# Altium PCB Flexprint_Serverport.PcbDoc
Units mm, origin at the board's own origin, x right, y up, seen from the top; angles counter-clockwise.
Board outline 22 x 16.17 mm, 2 copper layers (Top Layer, Bottom Layer); 5 components, 3 nets, 17 pads, 2 vias.
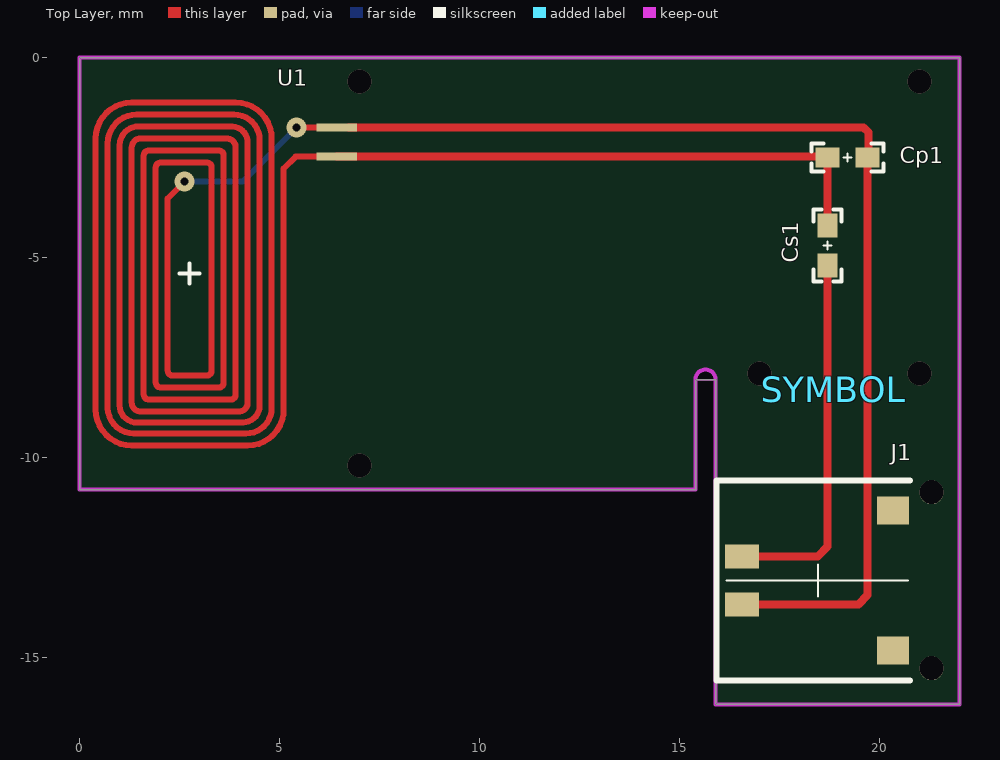
[diagram p0: Top Layer view]
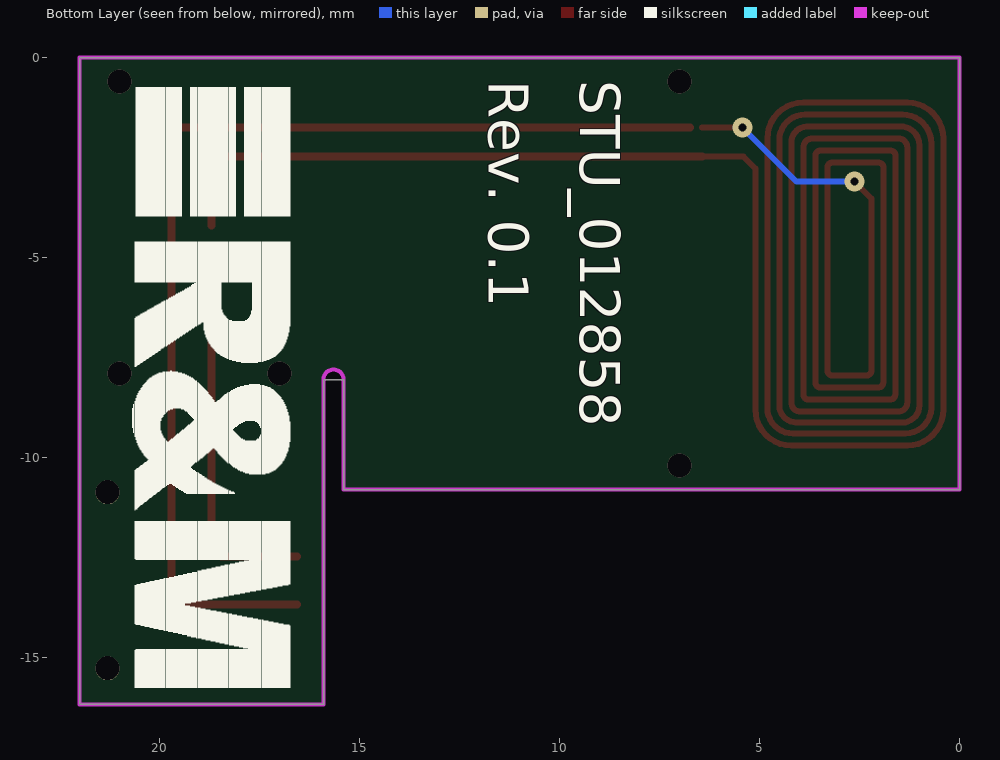
[diagram p1: Bottom Layer view, seen from below]
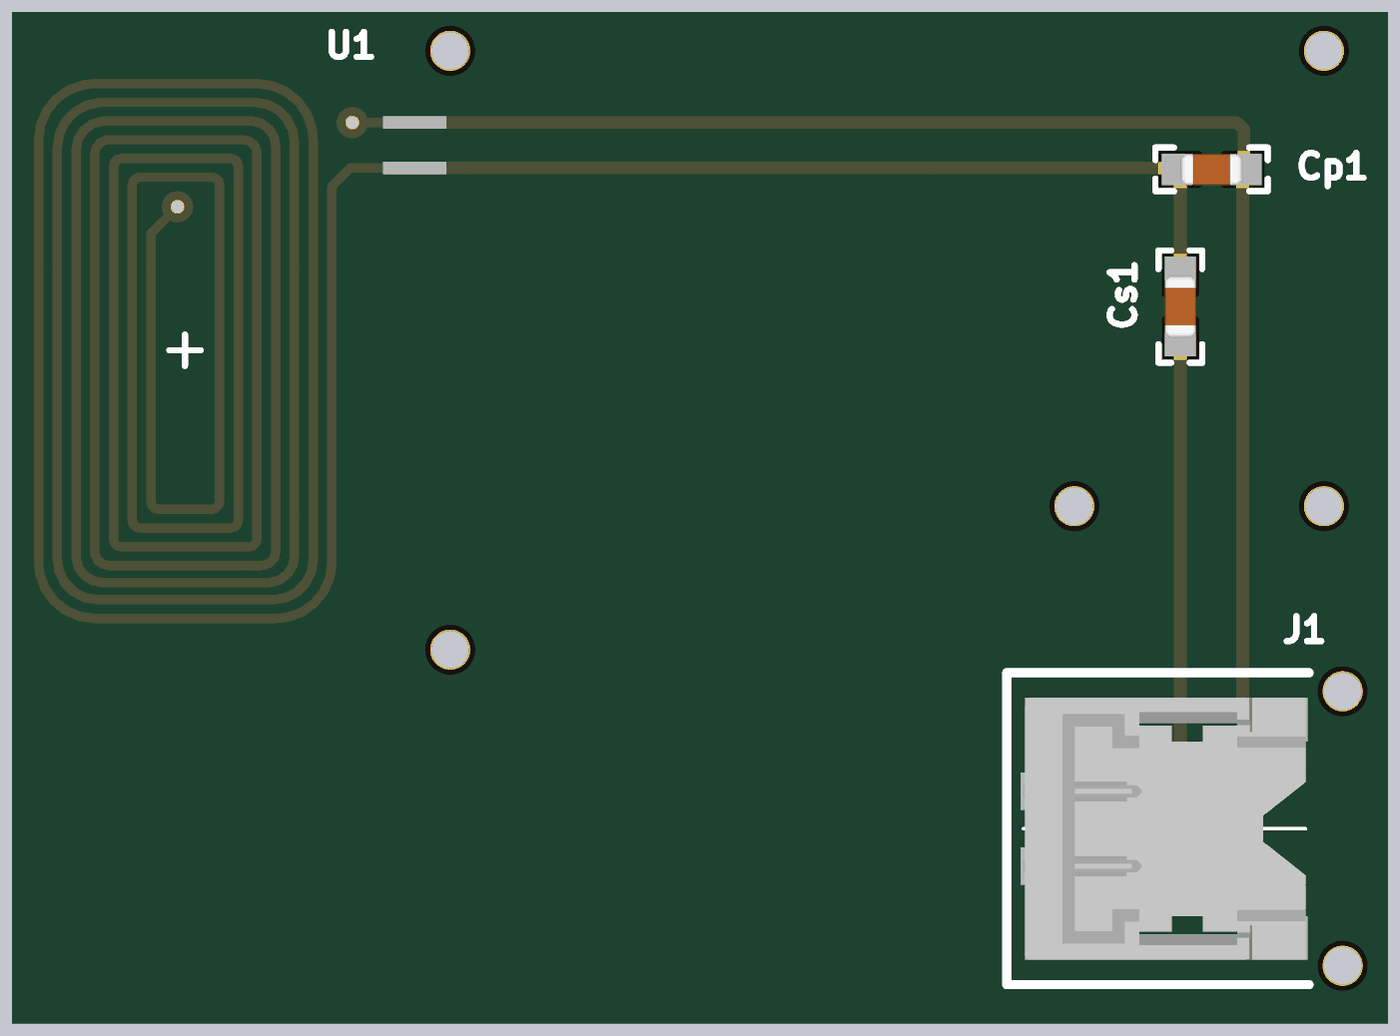
[diagram p2: 3D render of the assembled board from above, using the file's embedded part models]

## Layer stack, top to bottom
Top Solder: solder mask 0.0102, Solder Resist, Dk 3.5
Top Layer: signal copper 0.0356
Dielectric 1: dielectric 0.32, FR-4, Dk 4.8
Bottom Layer: signal copper 0.0356
Bottom Solder: solder mask 0.0102, Solder Resist, Dk 3.5

## Board outline
0,0 0,-10.8 15.4,-10.8 15.4,-8.05 15.9,-8.05 15.9,-16.17 22,-16.17 22,0
cut-out: 15.4,-8.05 15.9,-8.05 ccw(c15.65,-8.05)
board region rigid_2: 22,-9.45 22,-16.17 15.9,-16.17 15.9,-9.45
board region flex: 15.9,-9.45 15.9,-8.551 22,-8.57 22,-9.45
board region rigid_1: 15.9,-8.551 15.9,-8.05 15.4,-8.05 15.4,-10.8 0,-10.8 0,0 22,0 22,-8.57

## Design rules (kind name [scope] priority, off if disabled: settings)
Clearance [All] p1: gap=0.127 ignorepadtopadclearanceinfootprint=TRUE
MinimumSolderMaskSliver [All] p1: minsoldermaskwidth=0.1
PolygonConnect [All] p1: connectstyle=Relief reliefconductorwidth=0.254 reliefentries=4 polygonreliefangle="90 Angle" airgapwidth=0.254
RoomDefinition Flexprint_Serverport [InComponentClass('Flexprint_Serverport')] p1: confinementstyle=ConfineIn formatcopy=TRUE lockcomponents=FALSE outline -1.02,-17.51 23.06,-17.51 23.06,1.42 -1.02,1.42
RoutingVias [All] p1: holewidth=0.711 width=1.27 viastyle="Through Hole" minholewidth=0.508 minwidth=0.635 maxholewidth=1.27 maxwidth=2.032 useviatemplates=TRUE viatemplateguid#1={2C9BFAAF-4DE9-41A7-A408-CE1864FF48D1} viatemplatename#1=v50h20m0mx0
SilkToSolderMaskClearance [IsPad] p1 off: minsilkscreentomaskgap=0.1 clearancetoexposedcopper=TRUE
SolderMaskExpansion [All] p1: expansion=0.102
Width [All] p1: maxlimit=0.381 minlimit=0.127 preferedwidth=0.203 minimp=50.000000 maximp=50.000000 favimp=50.000000
28 further rules are at their usual default settings.

## Components (designator, comment, footprint, x,y, rotation, side; value= is the part's Value field where it differs from the comment)
Cp1 "470pF" C0402 19.2,-2.5 r0 top
Cs1 "180pF" C0402 18.7,-4.7 r270 top
J1 "Molex 0781710002" CONN_2X1 18.46,-13.07 r90 top
SYMBOL "Reichle & De-Massari Logo" SYMBOL_R&M 18.86,-8.29 r270 top net-tie value=Overlay
U1 "Antenna" ANT 2.75,-5.4 r180 top net-tie

## Footprints (in the part's own frame and the unit in brackets; to place one, negate y for a bottom-side part, rotate by r counter-clockwise, add the part's x,y. Pads: shape width x height; smd on the part's side, far side on the other; paste and mask are expansions set on the pad)
ANT [mil] "Antenna for Serverport"
  rect 40x8 smd: 1(-145,-143.7) 2(-145,-115)
  Top Layer lines w5.91: 80.51,131.89 ccw(c54.92,131.89) 80.51,132.3 ; 50.49,-144.69 -42.52,-144.69 ; 50.32,-144.69 ccw(c50.49,-126.48) 68.71,-126.48 68.7,129.92 ; 4.72,-90.55 21.46,-73.81 21.46,95.47 ccw(c16.54,95.47) 16.54,100.39 -16.92,100.4 ccw(c-16.92,95.47) -21.85,95.47 ; -15.94,-109.26 28.34,-109.26 ccw(c28.34,-104.33) 33.27,-104.33 33.27,107.28 ccw(c28.35,107.28) 28.35,112.2 ; -16.93,-109.26 cw(c-16.93,-104.33) -21.86,-104.33 -21.86,94.49 ; -42.51,-144.61 cw(c-41.54,-128.94) -57.24,-128.79 -57.29,126.97 cw(c-48.43,126.97) -48.43,135.83 ; -52.36,146.65 ccw(c-52.36,129.92) -52.48,146.65 ; -53.2,146.65 -52.48,146.65 ; -105.51,-143.7 -145,-143.7 ; -145,-115 -115,-115 -104.37,-115 -92.72,-103.35 -92.72,133.86 cw(c-57.28,133.86) -57.28,169.29 56.89,169.29 cw(c56.89,133.86) 92.32,133.86 92.32,-132.87 cw(c56.89,-132.87) 56.89,-168.31 -45.47,-168.31 cw(c-45.47,-132.87) -80.91,-132.87 -80.91,132.3 cw(c-55.73,132.3) -55.73,157.48 54.92,157.48 cw(c54.92,131.89) 80.51,132.3 ; 80.51,132.3 80.51,-127.95 cw(c51.97,-127.95) 51.97,-156.5 -43.91,-156.5 cw(c-43.91,-131.32) -69.09,-131.32 -69.09,129.92 cw(c-52.36,129.92) -52.48,146.65 ; 68.7,129.92 ccw(c51.97,129.92) 51.97,146.65 -52.48,146.65 ; 68.7,129.92 68.7,129.92 ; 40.16,124.02 cw(c40.16,119.09) 45.08,119.09 45.09,-116.14 cw(c40.15,-116.14) 40.15,-121.07 -28.73,-121.07 cw(c-28.73,-116.14) -33.66,-116.14 -33.66,107.28 cw(c-28.74,107.28) -28.74,112.21 28.35,112.2 ; 40.16,124.02 40.16,124.02 ; 40.16,124.02 -40.55,124.02 ccw(c-40.55,119.1) -45.48,119.1 -45.48,-124.01 ccw(c-36.61,-124.01) -36.61,-132.87 48.03,-132.88 ccw(c48.03,-124.02) 56.89,-124.02 56.89,126.97 ccw(c48.03,126.97) 48.03,135.83 -48.43,135.83 ; 28.35,112.2 28.35,112.2 ; -48.43,135.83 -48.43,135.83
  Bottom Layer lines w5.91: 4.72,-90.55 -52.36,-90.55 -105.51,-143.7
  silkscreen extent -10,-10 10,10
C0402 [mm]
  rect 0.6x0.5 smd mask+0.05: 1(-0.5,0) 2(0.5,0)
  silkscreen extent -0.9,-0.35 0.9,0.35, body extent -0.5,-0.25 0.5,0.25, height 0.6
CONN_2X1 [mm] "Molex Connector 2x1 Pin"
  rect 0.7x0.8 smd mask+0: 0(-1.75,-1.875) 0(1.75,-1.875)
  rect 0.6x0.85 smd mask+0: 1(-0.6,1.9) 2(0.6,1.9)
  silkscreen extent -2.5,-2.3 2.5,2.54, body extent -2.1,-2.25 2.1,2.28, height 1.45
SYMBOL_R&M [mm] "Reichle & De-Massari printing"

## Part data
Cp1: library part Cap_470pF_0402, "470pF ±1% 50V Ceramic Capacitor C0G, NP0 0402 (1005 Metric)", Dielectric Grade=C0G, Footprint/Package=0402, Manufacturer=Murata, Manufacturer PartNr=GRM1555C1H471FA01D, Supplier Part Number 1=490-8207-1-ND, Tolerance=±1%, voltage=50V, Replaceable=yes, Supplier 1=Digi-Key
Cs1: library part Cap_180pF_0402, "180pF ±1% 50V Ceramic Capacitor C0G, NP0 0402 (1005 Metric)", Dielectric Grade=C0G, Footprint/Package=0402, Manufacturer=Murata, Manufacturer PartNr=GRM1555C1H181FA01D, Supplier Part Number 1=490-8187-1-ND, Tolerance=±1%, voltage=50V, Replaceable=yes, Supplier 1=Digi-Key
J1: library part Conn_2x1, "Molex, connector Header SMD, 2 position 0.047\" (1.20mm)", Footprint/Package=SMD, Manufacturer=Molex, Manufacturer PartNr=0781710002, Supplier Part Number 1=WM4459CT-ND, Replaceable=no, Supplier 1=Digy-Key
SYMBOL: library part SYMBOL_R&M, Footprint/Package=2.54mm, Replaceable=no

## Free pads (board coordinates)
  round 0.6 hole 0.6: 2(7,-10.2) 2(7,-0.6) 2(17,-7.9) 2(21,-7.9) 2(21,-0.6) 2(21.3,-15.268) 2(21.3,-10.868)

## Via types
v1: diameter 0.5, hole 0.2, Top Layer to Bottom Layer, tented both sides, 2 vias

## Nets (pads, with @x,y where several pads share a name; then routed paths per layer and width w, separated by ;. In a path a pad name is that pad's centre, name@x,y a point inside that pad or via, vN(x,y) a via of type N, cw(c..) or ccw(c..) an arc to the next point about the centre after c; other vN are vias at no path point)
NetCp1_1: Cp1.1 Cs1.1 U1.2 | length 14
  Top Layer w0.203: U1.2 18.679,-2.479 Cp1.1 Cs1.1
NetCp1_2: Cp1.2 J1.1 U1.1 | length 27.8
  Top Layer w0.203: U1.1@6.737,-1.75 19.601,-1.75 19.72,-1.869 19.72,-2.48 Cp1.2 19.7,-13.441 19.471,-13.67 J1.1
NetCs1_2: Cs1.2 J1.2 | length 9.4
  Top Layer w0.203: J1.2 18.456,-12.47 18.7,-12.226 Cs1.2 Cs1.2@18.7,-5.1
pads on no net: J1.0
copper on no net:
  other v1: 2.63,-3.1 5.43,-1.75

## Keep-outs
Keep-Out Layer:
  the board outline again, w0.1

## Silkscreen, mask and mechanical layers (free items; w line width, h text height)
Bottom Overlay:
  text "STU_012858" at 9.48,-0.57 h1 r90
  text "Rev. 0.1" at 11.77,-0.57 h1 r90
Mechanical 1:
  the board outline again, w0.1
Mechanical 3 (Mech3):
Mechanical 13:
  circle w0.013: c7,-0.6 r0.3
  circle w0.013: c21,-0.6 r0.3
  circle w0.013: c21.3,-10.868 r0.3
  circle w0.013: c21.3,-15.268 r0.3
  circle w0.013: c7,-10.2 r0.3
  circle w0.013: c17,-7.9 r0.3
  circle w0.013: c21,-7.9 r0.3
  lines w0.013: 5.4,-10.2 8.6,-10.2 ; 5.4,-0.6 8.6,-0.6 ; 7,-11.8 7,-8.6 ; 7,-2.2 7,1 ; 15.4,-7.9 18.6,-7.9 ; 17,-9.5 17,-6.3 ; 19.4,-7.9 22.6,-7.9 ; 19.4,-0.6 22.6,-0.6 ; 21,-9.5 21,-6.3 ; 21,-2.2 21,1 ; 21.3,-16.868 21.3,-13.668 ; 21.3,-12.468 21.3,-9.268 ; 15.4,-8.05 cw(c15.65,-8.05) 15.9,-8.05 ; 15.4,-8.05 15.9,-8.05 ; 15.4,-8.05 15.4,-10.8 0,-10.8 0,0 22,0 22,-16.168 15.9,-16.168 15.9,-8.05 ; 16.135,-13.968 16.985,-13.968 16.985,-13.368 16.135,-13.368 16.135,-13.968 ; 16.135,-12.768 16.985,-12.768 16.985,-12.168 16.135,-12.168 16.135,-12.768 ; 19.935,-15.168 19.935,-14.468 20.735,-14.468 20.735,-15.168 19.935,-15.168 ; 19.935,-11.668 20.735,-11.668 20.735,-10.968 19.935,-10.968 19.935,-11.668